# Altium PCB SkayboardRev3.PcbDoc (part 2 of 2)
Units mil, origin at the board's own origin, x right, y up, seen from the top; angles counter-clockwise.
Board outline 13972.57 x 4222.54 mil, 2 copper layers (Top Layer, Bottom Layer); 99 components, 108 nets, 1166 pads, 135 vias.
Unrouted connection lines stored in the file: 96.
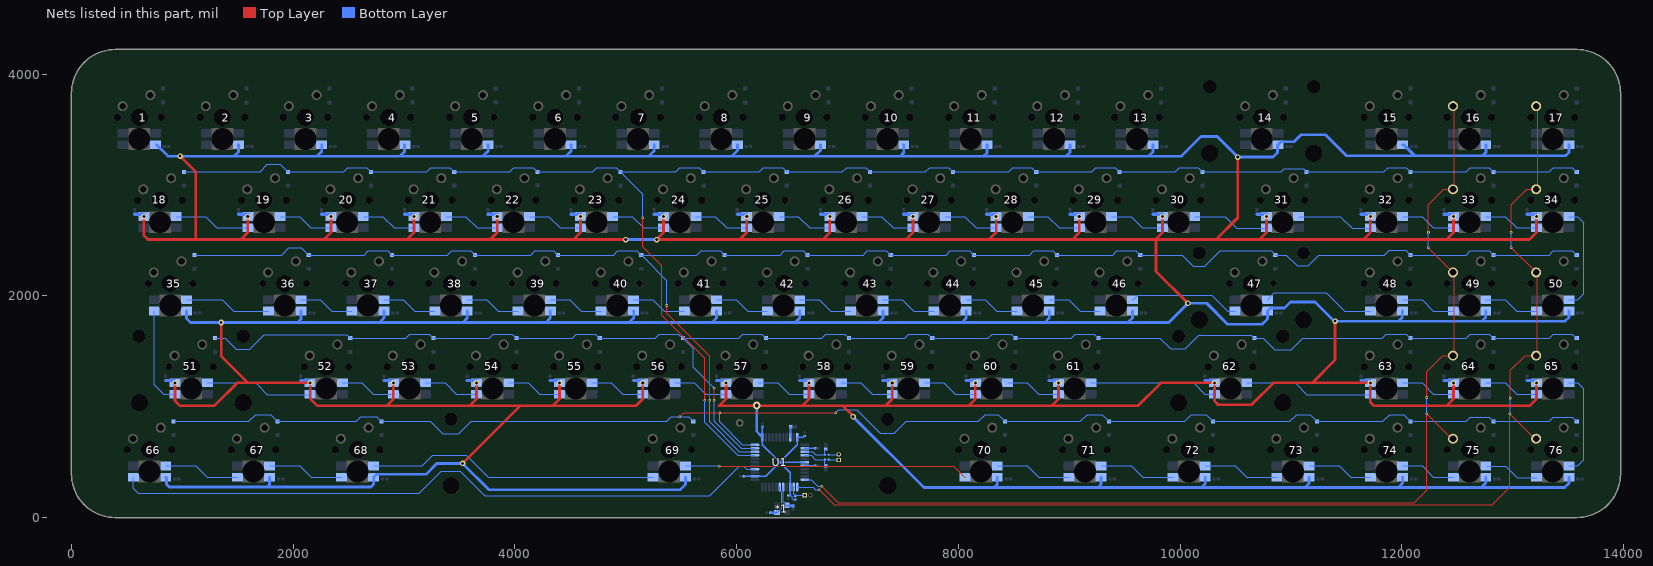
[diagram p2: the nets of this part, all layers, seen from the top]

## Via types
v1: diameter 24, hole 12, Top Layer to Bottom Layer, 90 vias
v2: diameter 50, hole 28, Top Layer to Bottom Layer, 41 vias
v3: diameter 40, hole 22, Top Layer to Bottom Layer, 3 vias
v4: diameter 30, hole 15, Top Layer to Bottom Layer, 1 vias

## Nets (pads, with @x,y where several pads share a name; then routed paths per layer and width w, separated by ;. In a path a pad name is that pad's centre, name@x,y a point inside that pad or via, vN(x,y) a via of type N, cw(c..) or ccw(c..) an arc to the next point about the centre after c; other vN are vias at no path point) (continued)
Net16_5: 16.5 33.5 49.5 64.5 75.5 U1.11 | length 10074.8
  Top Layer w5: v1(6767.72,283.46) 6917.32,133.86 12110.24,133.86 12224.41,248.03 v1(12224.41,937.01) 12224.41,935.04 12448.16,711.29 12453.92,711.29 75.5@12461.33,711.29 ; v1(12224.41,1082.68) 12224.41,1314.96 12370.74,1461.29 64.5@12461.33,1461.29 ; v1@12238.84,2433.1 49.5@12460.62,2211.31 ; 12240.16,2758.76 v1(12240.16,2574.8) 12240.16,2822.83 12378.61,2961.29 33.5@12463.29,2961.29 ; 16.5@12461.3,3711.31 12474.38,3698.23 33.5@12474.38,2974.4 ; 64.5@12470.44,1457.3 49.5@12470.44,2181.13
  Bottom Layer w5: U1.11@6614.17,342.52 6673.23,342.52 6732.28,283.46 v1(6767.72,283.46) ; v1(12224.41,937.01) v1(12224.41,1082.68) ; v1(12238.16,2433.1) 12240.16,2435.09 v1(12240.16,2574.8)
Net17_5: 17.5 34.5 50.5 65.5 76.5 U1.12 | length 10686.3
  Top Layer w5: v1(6744.09,251.97) 6881.89,114.17 12814.96,114.17 12974.41,273.62 v1(12974.41,937.01) 12974.41,935.04 13198.16,711.29 76.5@13211.33,711.29 ; v1(12976.38,1078.74) 12976.38,1326.77 13110.9,1461.29 65.5@13211.33,1461.29 ; v1(12988.19,2574.8) 12988.19,2822.83 13126.64,2961.29 34.5@13211.33,2961.29 ; v1@12988.86,2433.07 50.5@13210.65,2211.29 ; 17.5@13211.33,3711.29 13224.41,3698.2 34.5@13224.41,2974.37 ; 65.5@13220.47,1457.27 50.5@13220.47,2181.1
  Bottom Layer w5: U1.12@6547.24,275.59 6551.18,271.65 6688.98,271.65 6708.66,251.97 v1(6744.09,251.97) ; v1(12974.41,937.01) 12976.38,938.98 v1(12976.38,1078.74) ; v1(12988.19,2433.07) v1(12988.19,2574.8)
Net18_4: 18.4 19.2 | length 682.9
  Bottom Layer w5: 18.4@944.45,2715.59 1209.61,2715.59 1311.02,2614.17 19.2@1585.38,2614.17
Net18_6: 18.6 19.6 20.6 21.6 22.6 23.6 24.6 25.6 26.6 27.6 28.6 29.6 30.6 31.6 32.6 33.6 34.6 U1.30 | length 16219.8
  Top Layer w5: v1(5153.54,2704.72) 5153.54,2440.94 5322.83,2271.65 5322.83,1826.77 5712.6,1437.01 v1(5712.6,1059.06)
  Bottom Layer w5: 18.6@1014.86,3118.5 1701.18,3118.5 1767.72,3185.04 1884.89,3185.04 1951.4,3118.53 19.6@1952.39,3118.53 2454.22,3118.53 2491.17,3155.49 2664.45,3155.49 20.6@2701.43,3118.51 ; 20.6@2702.39,3118.53 3204.22,3118.53 3241.17,3155.49 3414.45,3155.49 3451.43,3118.51 3953.26,3118.51 3990.22,3155.46 4163.49,3155.46 4200.48,3118.48 4702.3,3118.48 4739.26,3155.44 4912.54,3155.44 4949.52,3118.46 23.6@4952.4,3118.53 ; 23.6@4952.4,3118.53 4953.38,3118.53 23.6@4953.46,3118.46 ; v1(5153.54,2704.72) 5153.54,2917.39 4968.6,3102.33 4968.6,3103.31 23.6@4953.46,3118.46 ; 24.6@5698.56,3118.43 5661.58,3155.41 5488.3,3155.41 5451.35,3118.46 23.6@4953.46,3118.46 ; 24.6@5702.4,3118.53 6204.23,3118.53 6241.18,3155.49 6414.46,3155.49 25.6@6451.44,3118.51 ; v1(5712.6,1059.06) 5712.6,858.27 6007.87,562.99 6041.78,562.99 U1.30@6165.35,562.99 ; 25.6@6452.4,3118.53 6954.23,3118.53 6991.18,3155.49 7164.46,3155.49 7201.44,3118.51 7703.27,3118.51 7740.23,3155.46 7913.51,3155.46 7950.49,3118.48 8452.32,3118.48 8489.27,3155.44 8662.55,3155.44 28.6@8699.53,3118.46 ; 28.6@8702.4,3118.53 9204.23,3118.53 9241.18,3155.49 9414.46,3155.49 29.6@9451.44,3118.51 ; 29.6@9452.4,3118.53 9954.23,3118.53 9991.18,3155.49 10164.46,3155.49 30.6@10201.44,3118.51 ; 30.6@10202.4,3118.53 10912.52,3118.53 10939.65,3145.67 11112.93,3145.67 11123.66,3134.95 11123.66,3133.73 11148.7,3108.69 31.6@11149.91,3108.69 ; 31.6@11139.86,3118.51 11838.98,3118.51 11875.94,3155.47 12039.6,3155.47 12061.2,3133.87 12061.2,3133.75 12076.41,3118.53 32.6@12077.4,3118.53 ; 32.6@12078.69,3118.53 12579.23,3118.53 12616.18,3155.49 12789.46,3155.49 12826.44,3118.51 13328.27,3118.51 13365.23,3155.46 13538.51,3155.46 34.6@13575.49,3118.48
Net19_4: 19.4 20.2 | length 500.5
  Bottom Layer w5: 19.4@1881.98,2715.62 2057.03,2715.62 2160.46,2612.18 20.2@2339.62,2612.18
Net20_4: 20.4 21.2 | length 500.5
  Bottom Layer w5: 20.4@2631.98,2715.62 2807.03,2715.62 2910.46,2612.18 21.2@3089.62,2612.18
Net21_4: 21.4 22.2 | length 500.5
  Bottom Layer w5: 21.4@3381.98,2715.62 3557.03,2715.62 3660.46,2612.18 22.2@3839.62,2612.18
Net22_4: 22.4 23.2 | length 500.5
  Bottom Layer w5: 22.4@4131.99,2715.62 4307.03,2715.62 4410.47,2612.19 23.2@4589.63,2612.19
Net23_4: 23.4 24.2 | length 500.5
  Bottom Layer w5: 23.4@4881.99,2715.62 5057.04,2715.62 5160.47,2612.18 24.2@5339.64,2612.18
Net24_4: 24.4 25.2 | length 500.5
  Bottom Layer w5: 24.4@5631.99,2715.62 5807.04,2715.62 5910.47,2612.18 25.2@6089.64,2612.18
Net25_4: 25.4 26.2 | length 500.5
  Bottom Layer w5: 25.4@6381.99,2715.62 6557.04,2715.62 6660.47,2612.18 26.2@6839.64,2612.18
Net26_4: 26.4 27.2 | length 500.5
  Bottom Layer w5: 26.4@7131.99,2715.62 7307.04,2715.62 7410.47,2612.18 27.2@7589.64,2612.18
Net27_4: 27.4 28.2 | length 500.5
  Bottom Layer w5: 27.4@7881.99,2715.62 8057.04,2715.62 8160.47,2612.18 28.2@8339.64,2612.18
Net28_4: 28.4 29.2 | length 500.5
  Bottom Layer w5: 28.4@8631.99,2715.62 8807.04,2715.62 8910.47,2612.18 29.2@9089.64,2612.18
Net29_4: 29.4 30.2 | length 500.5
  Bottom Layer w5: 29.4@9381.99,2715.62 9557.04,2715.62 9660.47,2612.18 30.2@9839.64,2612.18
Net30_4: 30.4 31.2 | length 691
  Bottom Layer w5: 30.4@10131.99,2715.62 10406.43,2715.62 10511.81,2610.24 10775.12,2610.24 31.2@10778.12,2613.23
Net31_4: 31.4 32.2 | length 691.1
  Bottom Layer w5: 31.4@11069.46,2715.6 11445.82,2715.6 11551.18,2610.24 11712.64,2610.24 32.2@11715.66,2613.25
Net32_4: 32.4 33.2 | length 500.5
  Bottom Layer w5: 32.4@12006.99,2715.62 12182.04,2715.62 12285.47,2612.18 33.2@12464.64,2612.18
Net33_4: 33.4 34.2 | length 500.5
  Bottom Layer w5: 33.4@12756.99,2715.62 12932.04,2715.62 13035.47,2612.18 34.2@13214.64,2612.18
Net34_4: 34.4 50.4 | length 956
  Bottom Layer w5: 50.4@13506.99,1965.62 13587.67,1965.62 13641.73,2019.68 13641.73,2661.42 13587.67,2715.48 34.4@13506.99,2715.48
Net35_2: 35.2 51.2 | length 887.8
  Bottom Layer w5: 35.2@746.87,1863.22 746.87,1198.02 831.66,1113.23 51.2@934.37,1113.23
Net35_4: 35.4 36.2 | length 782.7
  Bottom Layer w5: 35.4@1038.2,1965.58 1361.19,1965.58 1464.57,1862.2 36.2@1778.12,1862.2
Net35_6: 35.6 36.6 37.6 38.6 39.6 40.6 41.6 42.6 43.6 44.6 45.6 46.6 47.6 48.6 49.6 50.6 U1.31 | length 15388.5
  Top Layer w5: v1(5370.08,1913.39) 5370.08,1842.52 5755.91,1456.69 v1(5755.91,1059.06)
  Bottom Layer w5: 35.6@1108.61,2368.5 1896.06,2368.5 1960.63,2433.07 2074.31,2433.07 2138.87,2368.5 36.6@2139.86,2368.5 2641.69,2368.5 2678.64,2405.46 2851.92,2405.46 2888.9,2368.48 3391.72,2368.48 3428.67,2405.43 3601.95,2405.43 3638.93,2368.45 4140.76,2368.45 4177.72,2405.41 4351,2405.41 4387.98,2368.43 4889.81,2368.43 4926.76,2405.38 5100.04,2405.38 40.6@5137.02,2368.4 ; 40.6@5139.86,2368.51 40.6@5140.84,2368.51 ; v1(5370.08,1913.39) 5370.08,2138.29 5156.06,2352.31 5156.06,2353.3 40.6@5140.88,2368.48 ; v1(5755.91,1059.06) 5755.91,863.12 6024.53,594.49 U1.31@6165.35,594.49 ; 41.6@5888.93,2368.45 5851.95,2405.43 5678.67,2405.43 5641.72,2368.48 40.6@5140.88,2368.48 ; 41.6@5889.82,2368.48 6391.65,2368.48 6428.61,2405.43 6601.88,2405.43 6638.87,2368.45 7140.69,2368.45 7177.65,2405.41 7350.93,2405.41 43.6@7387.91,2368.43 ; 43.6@7389.86,2368.51 7891.73,2368.48 7928.68,2405.43 8101.96,2405.43 44.6@8138.94,2368.45 ; 44.6@8139.86,2368.51 8641.73,2368.48 8678.68,2405.43 8851.96,2405.43 45.6@8888.94,2368.45 ; 45.6@8889.86,2368.51 9391.73,2368.48 9428.68,2405.43 9601.96,2405.43 46.6@9638.94,2368.45 ; 46.6@9639.86,2368.51 10017.32,2368.51 10118.11,2267.72 10224.41,2267.72 10362.2,2405.51 10820.61,2405.51 10857.61,2368.51 47.6@10858.6,2368.51 10958.26,2368.51 11055.12,2271.65 11157.48,2271.65 11251.97,2366.14 11842.52,2366.14 11885.83,2409.45 12035.5,2409.45 12076.41,2368.53 48.6@12077.4,2368.53 12579.23,2368.53 12616.18,2405.49 12789.46,2405.49 12826.44,2368.51 13328.27,2368.51 13365.23,2405.46 13538.51,2405.46 50.6@13575.49,2368.48
Net36_4: 36.4 37.2 | length 500.5
  Bottom Layer w5: 36.4@2069.46,1965.59 2244.5,1965.59 2347.93,1862.15 37.2@2527.1,1862.15
Net37_4: 37.4 38.2 | length 500.5
  Bottom Layer w5: 37.4@2819.46,1965.59 2994.5,1965.59 3097.93,1862.15 38.2@3277.1,1862.15
Net38_4: 38.4 39.2 | length 500.5
  Bottom Layer w5: 38.4@3569.46,1965.59 3744.5,1965.59 3847.93,1862.15 39.2@4027.1,1862.15
Net39_4: 39.4 40.2 | length 500.5
  Bottom Layer w5: 39.4@4319.46,1965.59 4494.5,1965.59 4597.94,1862.16 40.2@4777.1,1862.16
Net40_4: 40.4 41.2 | length 500.5
  Bottom Layer w5: 40.4@5069.46,1965.6 5244.5,1965.6 5347.93,1862.16 41.2@5527.1,1862.16
Net41_4: 41.4 42.2 | length 500.5
  Bottom Layer w5: 41.4@5819.46,1965.6 5994.5,1965.6 6097.93,1862.16 42.2@6277.1,1862.16
Net42_4: 42.4 43.2 | length 500.5
  Bottom Layer w5: 42.4@6569.46,1965.6 6744.5,1965.6 6847.93,1862.16 43.2@7027.1,1862.16
Net43_4: 43.4 44.2 | length 500.5
  Bottom Layer w5: 43.4@7319.46,1965.6 7494.5,1965.6 7597.93,1862.16 44.2@7777.1,1862.16
Net44_4: 44.4 45.2 | length 500.5
  Bottom Layer w5: 44.4@8069.46,1965.6 8244.5,1965.6 8347.93,1862.16 45.2@8527.1,1862.16
Net45_4: 45.4 46.2 | length 500.5
  Bottom Layer w5: 45.4@8819.46,1965.6 8994.5,1965.6 9097.93,1862.16 46.2@9277.1,1862.16
Net46_4: 46.4 47.2 | length 1002.4
  Bottom Layer w5: 46.4@9569.46,1965.6 9579.3,1965.6 9617.64,2003.94 10287.4,2003.94 10429.13,1862.2 10495.83,1862.2 47.2@10496.86,1863.23
Net47_4: 47.4 48.2 | length 1022.1
  Bottom Layer w5: 47.4@10788.2,1965.6 10850.16,2027.56 11318.9,2027.56 11484.25,1862.2 11714.61,1862.2 48.2@11715.66,1863.25
Net48_4: 48.4 49.2 | length 500.5
  Bottom Layer w5: 48.4@12006.99,1965.62 12182.04,1965.62 12285.47,1862.18 49.2@12464.64,1862.18
Net49_4: 49.4 50.2 | length 500.5
  Bottom Layer w5: 49.4@12756.99,1965.62 12932.04,1965.62 13035.47,1862.18 50.2@13214.64,1862.18
Net51_4: 51.4 52.2 | length 972.3
  Bottom Layer w5: 51.4@1225.7,1215.59 1662.36,1215.59 1767.72,1110.24 2150.12,1110.24 52.2@2153.12,1113.23
Net51_6: 51.6 52.6 53.6 54.6 55.6 56.6 57.6 58.6 59.6 60.6 61.6 62.6 63.6 64.6 65.6 U1.32 | length 14263
  Top Layer w5: v1@5794,1061.72 5799.21,1066.93 v1(5799.21,1165.35)
  Bottom Layer w5: 51.6@1296.11,1618.5 1389.37,1618.5 1488.19,1519.68 1610.24,1519.68 1740.16,1649.61 2482.78,1649.61 2513.87,1618.51 52.6@2514.86,1618.51 3016.69,1618.51 3053.64,1655.46 3226.92,1655.46 3263.9,1618.48 3766.72,1618.48 3803.67,1655.44 3976.95,1655.44 4013.93,1618.46 4515.76,1618.46 4552.72,1655.41 4726,1655.41 4762.98,1618.43 5264.81,1618.43 5301.76,1655.39 5475.04,1655.39 56.6@5512.02,1618.41 ; 56.6@5514.86,1618.52 56.6@5519.28,1618.52 ; v1@5798.18,1166.38 5610.24,1354.33 5610.24,1527.56 5519.31,1618.48 6016.72,1618.48 6053.67,1655.44 6226.95,1655.44 57.6@6263.93,1618.46 ; v1(5799.21,1059.06) 5799.21,867.05 6040.28,625.98 U1.32@6165.35,625.98 ; 57.6@6264.82,1618.48 6766.65,1618.48 6803.61,1655.44 6976.88,1655.44 7013.87,1618.46 7515.69,1618.46 7552.65,1655.41 7725.93,1655.41 59.6@7762.91,1618.43 ; 59.6@7764.86,1618.52 8266.73,1618.48 8303.68,1655.44 8476.96,1655.44 60.6@8513.94,1618.46 ; 60.6@8514.86,1618.52 9016.73,1618.48 9053.68,1655.44 9226.96,1655.44 61.6@9263.94,1618.46 ; 61.6@9264.86,1618.52 9818.49,1618.52 9913.39,1523.62 10047.24,1523.62 10169.29,1645.67 10642.98,1645.67 10670.13,1618.52 62.6@10671.12,1618.52 10751.56,1618.52 10854.33,1515.75 11003.94,1515.75 11106.3,1618.11 11822.83,1618.11 11858.27,1653.54 12041.41,1653.54 12076.41,1618.54 63.6@12077.4,1618.54 12579.23,1618.54 12616.18,1655.49 12789.46,1655.49 12826.44,1618.51 13328.27,1618.51 13365.23,1655.47 13538.51,1655.47 65.6@13575.49,1618.49
Net52_4: 52.4 53.2 | length 500.5
  Bottom Layer w5: 52.4@2444.46,1215.59 2619.5,1215.59 2722.93,1112.16 53.2@2902.1,1112.16
Net53_4: 53.4 54.2 | length 500.5
  Bottom Layer w5: 53.4@3194.46,1215.59 3369.5,1215.59 3472.93,1112.16 54.2@3652.1,1112.16
Net54_4: 54.4 55.2 | length 500.5
  Bottom Layer w5: 54.4@3944.46,1215.6 4119.5,1215.6 4222.94,1112.16 55.2@4402.1,1112.16
Net55_4: 55.4 56.2 | length 500.5
  Bottom Layer w5: 55.4@4694.46,1215.6 4869.5,1215.6 4972.93,1112.16 56.2@5152.1,1112.16
Net56_4: 56.4 57.2 | length 500.5
  Bottom Layer w5: 56.4@5444.46,1215.6 5619.5,1215.6 5722.93,1112.16 57.2@5902.1,1112.16
Net57_4: 57.4 58.2 | length 500.5
  Bottom Layer w5: 57.4@6194.46,1215.6 6369.5,1215.6 6472.93,1112.16 58.2@6652.1,1112.16
Net58_4: 58.4 59.2 | length 500.5
  Bottom Layer w5: 58.4@6944.46,1215.6 7119.5,1215.6 7222.93,1112.16 59.2@7402.1,1112.16
Net59_4: 59.4 60.2 | length 500.5
  Bottom Layer w5: 59.4@7694.46,1215.6 7869.5,1215.6 7972.93,1112.16 60.2@8152.1,1112.16
Net60_4: 60.4 61.2 | length 500.5
  Bottom Layer w5: 60.4@8444.46,1215.6 8619.5,1215.6 8722.93,1112.16 61.2@8902.1,1112.16
Net61_4: 61.4 62.2 | length 1157.3
  Bottom Layer w5: 61.4@9194.46,1215.6 10122.98,1215.6 10224.41,1114.17 10308.44,1114.17 62.2@10309.38,1113.24
Net62_4: 62.4 63.2 | length 1159.8
  Bottom Layer w5: 62.4@10600.72,1215.6 11036.37,1215.6 11141.73,1110.24 11712.64,1110.24 63.2@11715.66,1113.26
Net63_4: 63.4 64.2 | length 500.5
  Bottom Layer w5: 63.4@12006.99,1215.62 12182.04,1215.62 12285.47,1112.18 64.2@12464.64,1112.18
Net64_4: 64.4 65.2 | length 500.5
  Bottom Layer w5: 64.4@12756.99,1215.62 12932.04,1215.62 13035.47,1112.18 65.2@13214.64,1112.18
Net65_4: 65.4 76.4 | length 956
  Bottom Layer w5: 76.4@13506.99,465.62 13587.67,465.62 13641.73,519.68 13641.73,1161.42 13587.67,1215.48 65.4@13506.99,1215.48
Net66_2: 66.2 U1.26 | length 6018.7
  Bottom Layer w5: 66.2@559.37,363.23 559.37,263.47 602.36,220.47 3137.8,220.47 3334.65,417.32 3507.87,417.32 3728.35,196.85 5755.91,196.85 6023.62,464.57 6062.99,464.57 6090.55,437.01 U1.26@6165.35,437.01
Net66_4: 66.4 67.2 | length 689.7
  Bottom Layer w5: 66.4@850.7,465.59 1121.02,465.59 1224.41,362.2 67.2@1497.62,362.2
Net66_6: 66.6 67.6 68.6 69.6 70.6 71.6 72.6 73.6 74.6 75.6 76.6 U1.33 | length 13938.8
  Top Layer w5: v1(5488.07,909.45) 5523.5,944.88 v1(5846.46,944.88) v1(6893.7,944.88)
  Bottom Layer w5: 66.6@921.11,868.51 1600.79,868.51 1661.42,929.13 1797,929.13 1857.63,868.51 67.6@1858.61,868.51 2569.3,868.51 2610.24,909.45 2753.21,909.45 2794.15,868.51 68.6@2795.13,868.51 ; 68.6@2796.11,868.51 3237.79,868.51 3350.39,755.91 3492.13,755.91 3606.3,870.08 5370.08,870.08 5409.45,909.45 v1(5488.07,909.45) 5566.68,909.45 5607.61,868.52 69.6@5608.6,868.52 ; v1(5846.46,944.88) 5846.46,863.12 6052.09,657.48 U1.33@6165.35,657.48 ; v1(6893.7,944.88) 6921.26,972.44 7082.68,972.44 7295.28,759.84 7421.26,759.84 7531.5,870.08 8181.1,870.08 8240.16,929.13 8359.52,929.13 8420.13,868.52 70.6@8421.12,868.52 9100.8,868.52 9161.43,929.15 9297.01,929.15 9357.64,868.52 10041.75,868.52 10102.38,929.15 10233.53,929.15 10294.16,868.52 72.6@10295.14,868.52 ; 72.6@10296.12,868.52 10990.56,868.52 11051.19,929.15 11172.01,929.15 11232.64,868.52 11829.15,868.52 11889.76,929.13 12016.8,929.13 74.6@12077.4,868.54 ; 74.6@12080.29,868.54 12579.23,868.54 12616.18,905.49 12789.46,905.49 12826.44,868.51 13328.27,868.51 13365.23,905.47 13538.51,905.47 76.6@13575.49,868.49
Net67_4: 67.4 68.2 | length 689.7
  Bottom Layer w5: 67.4@1788.21,465.59 2058.53,465.59 2161.91,362.21 68.2@2435.13,362.21
Net68_4: 68.4 69.2 | length 2644.2
  Bottom Layer w5: 68.4@2725.71,465.6 3162.45,465.6 3259.84,562.99 3559.06,562.99 3758.81,363.24 69.2@5246.86,363.24
Net69_4: 69.4 70.2 | length 2563.7
  Top Layer w5: v1(5842.52,464.57) 7956.69,464.57 v1(8059.06,362.2)
  Bottom Layer w5: 69.4@5538.2,465.6 5841.49,465.6 v1(5842.52,464.57)
Net70_4: 70.4 71.2 | length 689.7
  Bottom Layer w5: 70.4@8350.72,465.6 8621.04,465.6 8724.42,362.22 71.2@8997.63,362.22
Net71_4: 71.4 72.2 | length 689.7
  Bottom Layer w5: 71.4@9288.2,465.6 9558.52,465.6 9661.9,362.22 72.2@9935.11,362.22
Net72_4: 72.4 73.2 | length 689.7
  Bottom Layer w5: 72.4@10225.72,465.6 10496.04,465.6 10599.42,362.22 73.2@10872.63,362.22
Net73_4: 73.4 74.2 | length 595.3
  Bottom Layer w5: 73.4@11163.2,465.6 11433.52,465.6 11536.9,362.22 74.2@11715.66,362.22
Net74_4: 74.4 75.2 | length 500.5
  Bottom Layer w5: 74.4@12006.99,465.62 12182.04,465.62 12285.47,362.18 75.2@12464.64,362.18
Net75_4: 75.4 76.2 | length 500.5
  Bottom Layer w5: 75.4@12763.78,464.57 12938.82,464.57 13042.26,361.13 76.2@13221.42,361.13
NetC1_2: C1.2 U1.42 | length 96.3
  Bottom Layer w15: U1.42@6484.25,724.41 6485.9,726.06 6485.9,816.22 C1.2@6488.58,818.9
NetC2_1: C2.1 R1.1 U1.3 | length 240.5
  Bottom Layer w5: U1.3@6614.17,594.49 6685.04,594.49 6712.6,566.93 R1.1@6795.28,566.93 C2.1@6795.28,614.17
  Bottom Layer w10: C2.1@6807.09,618.11 C2.1@6807.09,618.9
NetC3_2: C3.2 R2.1 U1.4 | length 255.8
  Bottom Layer w5: U1.4@6614.17,562.99 6670.96,562.99 6710.33,523.62 R2.1@6795.28,523.62 ; C3.2@6795.99,475.66 R2.1@6795.99,522.9
  Bottom Layer w10: R2.1@6795.28,523.62 R2.1@6795.99,522.9 ; C3.2@6795.99,475.66 C3.2@6803.15,468.5
NetC4_2: *1.3 C4.2 U1.16 | length 236
  Bottom Layer w5: U1.16@6421.37,278.94 6421.37,136.52 *1.3@6447.66,110.24 ; *1.3@6446.85,110.24 *1.3@6447.66,110.24 ; *1.3@6448.59,109.3 *1.3@6447.66,110.24 ; *1.3@6448.82,110.24 *1.3@6447.66,110.24
  Bottom Layer w20: *1.3@6454.72,106.3 C4.2@6507.87,106.3
NetC5_2: *1.1 C5.2 U1.17 | length 315.4
  Bottom Layer w5: *1.1@6364.17,43.31 6405.55,84.68 6405.55,228.45 6404.63,229.32 cw(c6421.26,247.05) 6402.98,231.03 6402.86,231.14 6390.06,243.94 U1.17@6390.06,276.85
  Bottom Layer w20: C5.2@6304.72,43.31 6304.93,43.51 6360.44,43.51 *1.1@6362.2,45.28
NetR1_2: R1.2 USB.2 | length 99.6
  Bottom Layer w5: R1.2@6828.15,568.31 USB.2@6923.82,568.31
  Bottom Layer w10: R1.2@6826.77,566.93 R1.2@6828.15,568.31 ; USB.2@6923.82,568.31 USB.2@6925.2,569.68
NetR2_2: R2.2 USB.1 | length 100.1
  Bottom Layer w5: R2.2@6826.77,523.62 USB.1@6921.26,523.62
  Bottom Layer w10: USB.1@6921.26,523.62 USB.1@6925.2,519.68
NetR3_2: R3.2 RST.1 U1.13 | length 172.6
  Bottom Layer w7.5: U1.13@6515.75,275.59 6515.75,210.63 R3.2@6527.56,198.82 ; R3.2@6528.54,199.8 RST.1@6614.37,199.8
  Bottom Layer w15: U1.13@6515.75,275.59 U1.13@6517.4,273.94 ; R3.2@6527.56,198.82 R3.2@6528.54,199.8 ; RST.1@6614.37,199.8 RST.1@6615.35,200.79
VCC: 1.3 2.3 3.3 4.3 5.3 6.3 7.3 8.3 9.3 10.3 11.3 12.3 13.3 14.3 15.3 16.3 17.3 18.1 19.1 20.1 21.1 22.1 23.1 24.1 25.1 26.1 27.1 28.1 29.1 30.1 31.1 32.1 33.1 34.1 35.3 36.3 37.3 38.3 39.3 40.3 41.3 42.3 43.3 44.3 45.3 46.3 47.3 48.3 49.3 50.3 51.1 52.1 53.1 54.1 55.1 56.1 57.1 58.1 59.1 60.1 61.1 62.1 63.1 64.1 65.1 66.3 67.3 68.3 69.3 70.3 71.3 72.3 73.3 74.3 75.3 76.3 C6.1 C7.1 C8.1 C9.1 C10.1 C11.1 pad.@6181.1,1011.81 R3.1 U1.2 U1.6 U1.7 U1.14 U1.24 U1.34 U1.44 | length 80208.4
  Top Layer w25: v2(653.12,2715.59) 653.12,2543.74 688.98,2507.87 1527.56,2507.87 ; v2(934.37,1215.59) 934.37,1053.82 980.34,1007.85 1287.38,1007.85 1495.12,1215.59 1591.49,1215.59 ; v2(980.32,3259.84) 1122.05,3118.11 1122.05,2507.87 ; v2(1350.39,1759.84) 1350.39,1456.69 1591.49,1215.59 ; v2(1590.64,2715.62) 1590.64,2570.96 1527.56,2507.87 ; v2(2340.64,2715.62) 2340.64,2570.96 2277.56,2507.87 ; 2840.03,1007.85 2903.12,1070.94 v2(2903.12,1215.59) ; v2(3090.64,2715.62) 3090.64,2570.96 3027.56,2507.88 ; v2(3527.56,488.19) 4047.23,1007.86 ; v2(3653.12,1215.6) 3653.12,1070.94 3590.04,1007.86 ; v2(3840.65,2715.62) 3840.65,2570.97 3777.57,2507.88 ; v2(4403.12,1215.6) 4403.12,1070.94 4340.03,1007.86 ; v2(4590.66,2715.62) 4590.66,2570.96 4527.57,2507.87 ; v2(5000,2507.87) 4527.57,2507.87 ; v2(5153.12,1215.6) 5153.12,1070.94 5090.03,1007.86 4340.03,1007.86 ; v2(5340.66,2715.62) 5340.66,2570.96 5277.57,2507.87 v2(5279.53,2507.87) 6027.57,2507.87 ; v2(5903.12,1215.6) 5903.12,1070.94 5840.03,1007.86 6590.03,1007.86 ; v2(6090.66,2715.62) 6090.66,2570.96 6027.57,2507.87 ; v2(6653.12,1215.6) 6653.12,1070.94 6590.03,1007.86 ; v2(6840.66,2715.62) 6840.66,2570.96 6777.57,2507.87 ; v2(7051.18,909.45) 7049.11,909.45 7047.24,911.32 7047.24,921.26 6960.65,1007.86 ; v2(7403.12,1215.6) 7403.12,1070.94 7340.03,1007.86 ; v2(7590.66,2715.62) 7590.66,2570.96 7527.57,2507.87 ; v2(8153.12,1215.6) 8153.12,1070.94 8090.03,1007.86 ; v2(8340.66,2715.62) 8340.66,2570.96 8277.57,2507.87 ; v2(8903.12,1215.6) 8903.12,1070.94 8840.03,1007.86 ; v2(9090.66,2715.62) 9090.66,2570.96 9027.57,2507.87 ; v2(9840.66,2715.62) 9840.66,2570.96 9777.57,2507.87 9027.57,2507.87 ; v2(10070.87,1933.07) 9783.46,2220.47 9783.46,2507.85 10322.83,2507.85 ; v2(10519.69,3251.97) 10519.69,2704.7 10322.83,2507.85 ; 10669.29,2507.85 10322.83,2507.85 ; 10669.29,2507.87 10715.05,2507.87 ; v2(10778.12,2715.6) 10778.12,2570.94 10715.05,2507.87 ; v2(11397.64,1771.65) 11397.64,1421.26 11192,1215.62 ; v2(11715.66,2715.62) 11715.66,2570.96 11652.57,2507.87 ; v2(12465.66,1215.62) 12465.66,1070.96 12402.57,1007.88 ; v2(12465.66,2715.62) 12465.66,2570.96 12402.57,2507.87 ; v2(13215.66,1215.62) 13215.66,1070.96 13152.57,1007.88 12402.57,1007.88 ; v2(13215.66,2715.62) 13215.66,2570.96 13152.57,2507.87 12402.57,2507.87 ; 1527.56,2507.87 2277.56,2507.87 ; 1591.49,1215.59 v2(2153.12,1215.59) 2153.12,1070.94 2157.39,1070.94 2220.47,1007.85 2751.45,1007.85 3501.45,1007.85 3590.04,1007.86 ; 2277.56,2507.87 2938.98,2507.87 3027.56,2507.88 ; 3027.56,2507.88 3777.57,2507.88 ; 3590.04,1007.86 4047.23,1007.86 ; 3777.57,2507.87 4527.57,2507.87 ; 4047.23,1007.86 4340.03,1007.86 ; 6027.57,2507.87 6777.57,2507.87 ; 6590.03,1007.86 6960.65,1007.86 ; 6777.57,2507.87 7527.57,2507.87 ; 6960.65,1007.86 7340.03,1007.86 ; 7340.03,1007.86 8090.03,1007.86 ; 7527.57,2507.87 8277.57,2507.87 ; 8090.03,1007.86 8840.03,1007.86 ; 8277.57,2507.87 9027.57,2507.87 ; 8840.03,1007.86 9618.09,1007.86 9825.84,1215.6 v2(10309.38,1215.6) 10311.02,1213.95 10311.02,1051.18 10343.98,1018.23 10644.21,1018.23 10841.6,1215.62 11192,1215.62 ; 10715.05,2507.87 11563.99,2507.87 11652.57,2507.87 ; 11192,1215.62 v2(11715.66,1215.62) 11715.66,1040.25 11748.03,1007.88 12402.57,1007.88 ; 11652.57,2507.87 12402.57,2507.87
  Bottom Layer w5: 6476.41,196.82 6492.15,196.82 6499.41,189.57 6499.41,169.88 6506.09,163.2 6527.37,163.2 R3.1@6527.56,163.39
  Bottom Layer w10: 1.3@756.95,3363.28 1.3@766.8,3363.28
  Bottom Layer w15: C7.1@6062.99,374.02 U1.24@6165.35,374.02 6263.78,374.02 6383.55,493.79 6383.55,500 6383.55,506.21 6232.28,657.48 U1.34@6232.28,724.41 C9.1@6232.28,821.63 ; 6476.38,196.85 6484.25,204.72 U1.14@6484.25,275.59 6484.25,405.51 6389.76,500 ; U1.7@6614.17,468.5 C6.1@6708.66,468.5 ; U1.6@6614.17,500 6389.76,500 ; U1.2@6614.17,625.98 C10.1@6708.66,625.98 ; C8.1@6614.17,736.22 6602.36,724.41 U1.44@6547.24,724.41 6547.24,657.48 6389.76,500
  Bottom Layer w20: pad.@6181.1,1011.81 6181.1,775.59 U1.34@6229.47,727.22
  Bottom Layer w25: 1.3@766.8,3363.28 870.23,3259.84 1468.5,3259.84 ; 66.3@850.7,363.23 856.48,357.45 856.48,301 881.89,275.59 1763.78,275.59 ; 35.3@1038.2,1863.22 1038.2,1796.44 1074.8,1759.84 v2(1350.39,1759.84) 2039.37,1759.84 ; 2.3@1506.98,3363.25 1507.87,3362.36 1507.87,3299.21 1468.5,3259.84 ; 67.3@1788.21,363.23 1787.4,362.43 1787.4,299.21 1763.78,275.59 ; 36.3@2069.46,1863.23 2069.46,1789.93 2039.37,1759.84 ; 3.3@2256.98,3363.25 2256.98,3300.29 2216.54,3259.84 ; 37.3@2819.46,1863.23 2818.9,1862.67 2818.9,1799.21 2779.53,1759.84 ; 4.3@3005.01,3363.25 3005.01,3300.29 2964.57,3259.84 ; 38.3@3569.46,1863.23 3569.46,1797.8 3531.5,1759.84 ; 5.3@3756.98,3363.25 3759.84,3360.39 3759.84,3307.09 3712.6,3259.84 ; 39.3@4319.46,1863.23 4318.9,1862.67 4318.9,1799.21 4279.53,1759.84 ; 6.3@4506.92,3363.25 4507.87,3362.3 4507.87,3307.09 4460.63,3259.84 ; v2(5000,2507.87) v2(5279.53,2507.87) ; 40.3@5069.46,1863.23 5070.87,1861.82 5070.87,1799.21 5031.5,1759.84 ; 7.3@5256.96,3363.29 5255.91,3362.24 5255.91,3307.09 5208.66,3259.84 ; 69.3@5538.2,363.24 5538.2,298.04 5492.13,251.97 3763.78,251.97 v2(3527.56,488.19) 3295.28,488.19 3197.19,390.1 2752.58,390.1 68.3@2725.71,363.23 2725.71,300.51 2700.79,275.59 1763.78,275.59 ; 41.3@5819.46,1863.23 5818.9,1862.68 5818.9,1799.21 5779.53,1759.84 ; 8.3@6006.99,3363.25 6006.99,3310.14 5956.69,3259.84 ; 42.3@6569.46,1863.23 6569.46,1801.74 6527.56,1759.84 ; 9.3@6756.99,3363.25 6755.91,3362.16 6755.91,3311.02 6704.72,3259.84 ; v2(7051.18,909.45) 7688.98,271.65 8322.83,271.65 ; 43.3@7319.46,1863.23 7318.9,1862.68 7318.9,1799.21 7279.53,1759.84 ; 10.3@7506.99,3363.25 7506.99,3290.46 7476.38,3259.84 ; 44.3@8069.46,1863.23 8070.87,1861.82 8070.87,1799.21 8031.5,1759.84 ; 11.3@8256.99,3363.25 8256.99,3288.49 8228.35,3259.84 ; 70.3@8350.72,363.24 8350.39,362.92 8350.39,299.21 8322.83,271.65 ; 45.3@8819.46,1863.23 8818.9,1862.68 8818.9,1799.21 8779.53,1759.84 ; 12.3@9006.99,3363.25 9006.99,3294.4 8972.44,3259.84 ; 71.3@9288.2,363.24 9287.4,362.44 9287.4,299.21 9259.84,271.65 ; 46.3@9569.46,1863.23 9569.46,1801.74 9527.56,1759.84 ; 13.3@9756.99,3363.25 9755.91,3362.16 9755.91,3299.21 9716.54,3259.84 ; 72.3@10225.72,363.24 10225.72,304.46 10192.91,271.65 ; 73.3@11163.2,363.24 11161.42,361.46 11161.42,307.09 11125.98,271.65 ; 74.3@12006.99,363.26 12007.87,362.38 12007.87,311.02 11968.5,271.65 ; 48.3@12006.99,1863.25 12003.94,1860.2 12003.94,1803.15 11972.44,1771.65 ; 15.3@12006.99,3363.25 12016.84,3363.25 12116.31,3263.78 ; 16.3@12756.97,3363.28 12759.84,3360.41 12759.84,3295.28 12728.35,3263.78 ; 75.3@12756.99,363.26 12756.99,312.11 12716.54,271.65 ; 49.3@12756.99,1863.25 12755.91,1862.16 12755.91,1803.15 12724.41,1771.65 ; 76.3@13506.99,363.26 13506.99,310.14 13468.5,271.65 12716.54,271.65 ; 50.3@13506.99,1863.25 13506.99,1806.21 13472.44,1771.65 12724.41,1771.65 ; 17.3@13506.99,3363.25 13506.99,3294.4 13476.38,3263.78 12728.35,3263.78 ; 1468.5,3259.84 2216.54,3259.84 ; 2039.37,1759.84 2779.53,1759.84 ; 2216.54,3259.84 2964.57,3259.84 ; 2779.53,1759.84 3531.5,1759.84 ; 2964.57,3259.84 3712.6,3259.84 ; 3531.5,1759.84 4279.53,1759.84 ; 3712.6,3259.84 4460.63,3259.84 ; 4279.53,1759.84 5031.5,1759.84 ; 4460.63,3259.84 5208.66,3259.84 ; 5031.5,1759.84 5779.53,1759.84 ; 5208.66,3259.84 5956.69,3259.84 ; 5779.53,1759.84 6527.56,1759.84 ; 5956.69,3259.84 6704.72,3259.84 ; 6527.56,1759.84 7279.53,1759.84 ; 6704.72,3259.84 7476.38,3259.84 ; 7279.53,1759.84 8031.5,1759.84 ; 7476.38,3259.84 8228.35,3259.84 ; 8031.5,1759.84 8779.53,1759.84 ; 8228.35,3259.84 8972.44,3259.84 ; 8322.83,271.65 9259.84,271.65 ; 8779.53,1759.84 9527.56,1759.84 ; 8972.44,3259.84 9716.54,3259.84 ; 9259.84,271.65 10192.91,271.65 ; 9527.56,1759.84 9897.64,1759.84 v2(10070.87,1933.07) 10240.16,1933.07 10429.13,1744.09 10740.16,1744.09 10787.4,1791.34 10787.4,1862.44 47.3@10788.2,1863.23 10815.07,1890.1 10941.28,1890.1 10996.06,1944.88 11216.54,1944.88 11389.76,1771.65 v2(11397.64,1771.65) 11972.44,1771.65 ; 9716.54,3259.84 10011.81,3259.84 10188.98,3437.01 10334.65,3437.01 v2(10519.69,3251.97) 10838.58,3251.97 10877.95,3291.34 10877.95,3359.21 14.3@10881.99,3363.25 10908.87,3390.12 11027.92,3390.12 11090.55,3452.76 11311.02,3452.76 11500,3263.78 12116.31,3263.78 ; 10192.91,271.65 11125.98,271.65 ; 11125.98,271.65 11968.5,271.65 ; 11968.5,271.65 12716.54,271.65 ; 11972.44,1771.65 12724.41,1771.65 ; 12116.31,3263.78 12728.35,3263.78
pads on no net: 1. 2. 3. 4. 5. 6. 7. 8. 9. 10. 11. 12. 13. 14. 15. 16. 17. 17.4 18. 19. 20. 21. 22. 23. 24. 25. 26. 27. 28. 29. 30. 31. 32. 33. 34. 35. 36. 37. 38. 39. 40. 41. 42. 43. 44. 45. 46. 47. 48. 49. 50. 51. 52. 53. 54. 55. 56. 57. 58. 59. 60. 61. 62. 63. 64. 65. 66. 67. 68. 69. 70. 71. 72. 73. 74. 75. 76. *1.2 *1.4 ?. U1.27 U1.28 U1.36
copper on no net: | length 1664.9
  Top Layer w25: 5090.03,1007.86 5840.03,1007.86
  Bottom Layer w5: v3@5842.52,523.62 5881.89,484.25 6090.55,484.25 6106.3,468.5 6165.35,468.5 ; v3(5842.52,598.43) 5901.57,539.37 5933.07,507.87 6102.36,507.87 6108.96,501.27 6164.08,501.27 6165.35,500 ; v3(6259.84,905.51) 6295.28,870.08 6295.28,724.41 ; 11705.81,363.26 11715.66,363.26
  other v3: 5842.52,527.56

## Other copper
Bottom Layer:
  rectangle net VCC: 6586.61,468.5 6641.73,500

## Silkscreen, mask and mechanical layers (free items; w line width, h text height)
Top Overlay:
  text "- By Skaytacium and NNNI" at 365.7,1799.25 h70 r90
  text "Skayboard" at 286.16,1410.23 h250 r90